# Altium PCB ET2_test Chip.PcbDoc
Units mm, origin at the board's own origin, x right, y up, seen from the top; angles counter-clockwise.
Board outline 101.6 x 91.44 mm, 4 copper layers (Top Layer, GND, POWER, Bottom Layer), stack 1.565 mm thick; 148 components, 68 nets, 450 pads, 320 vias.
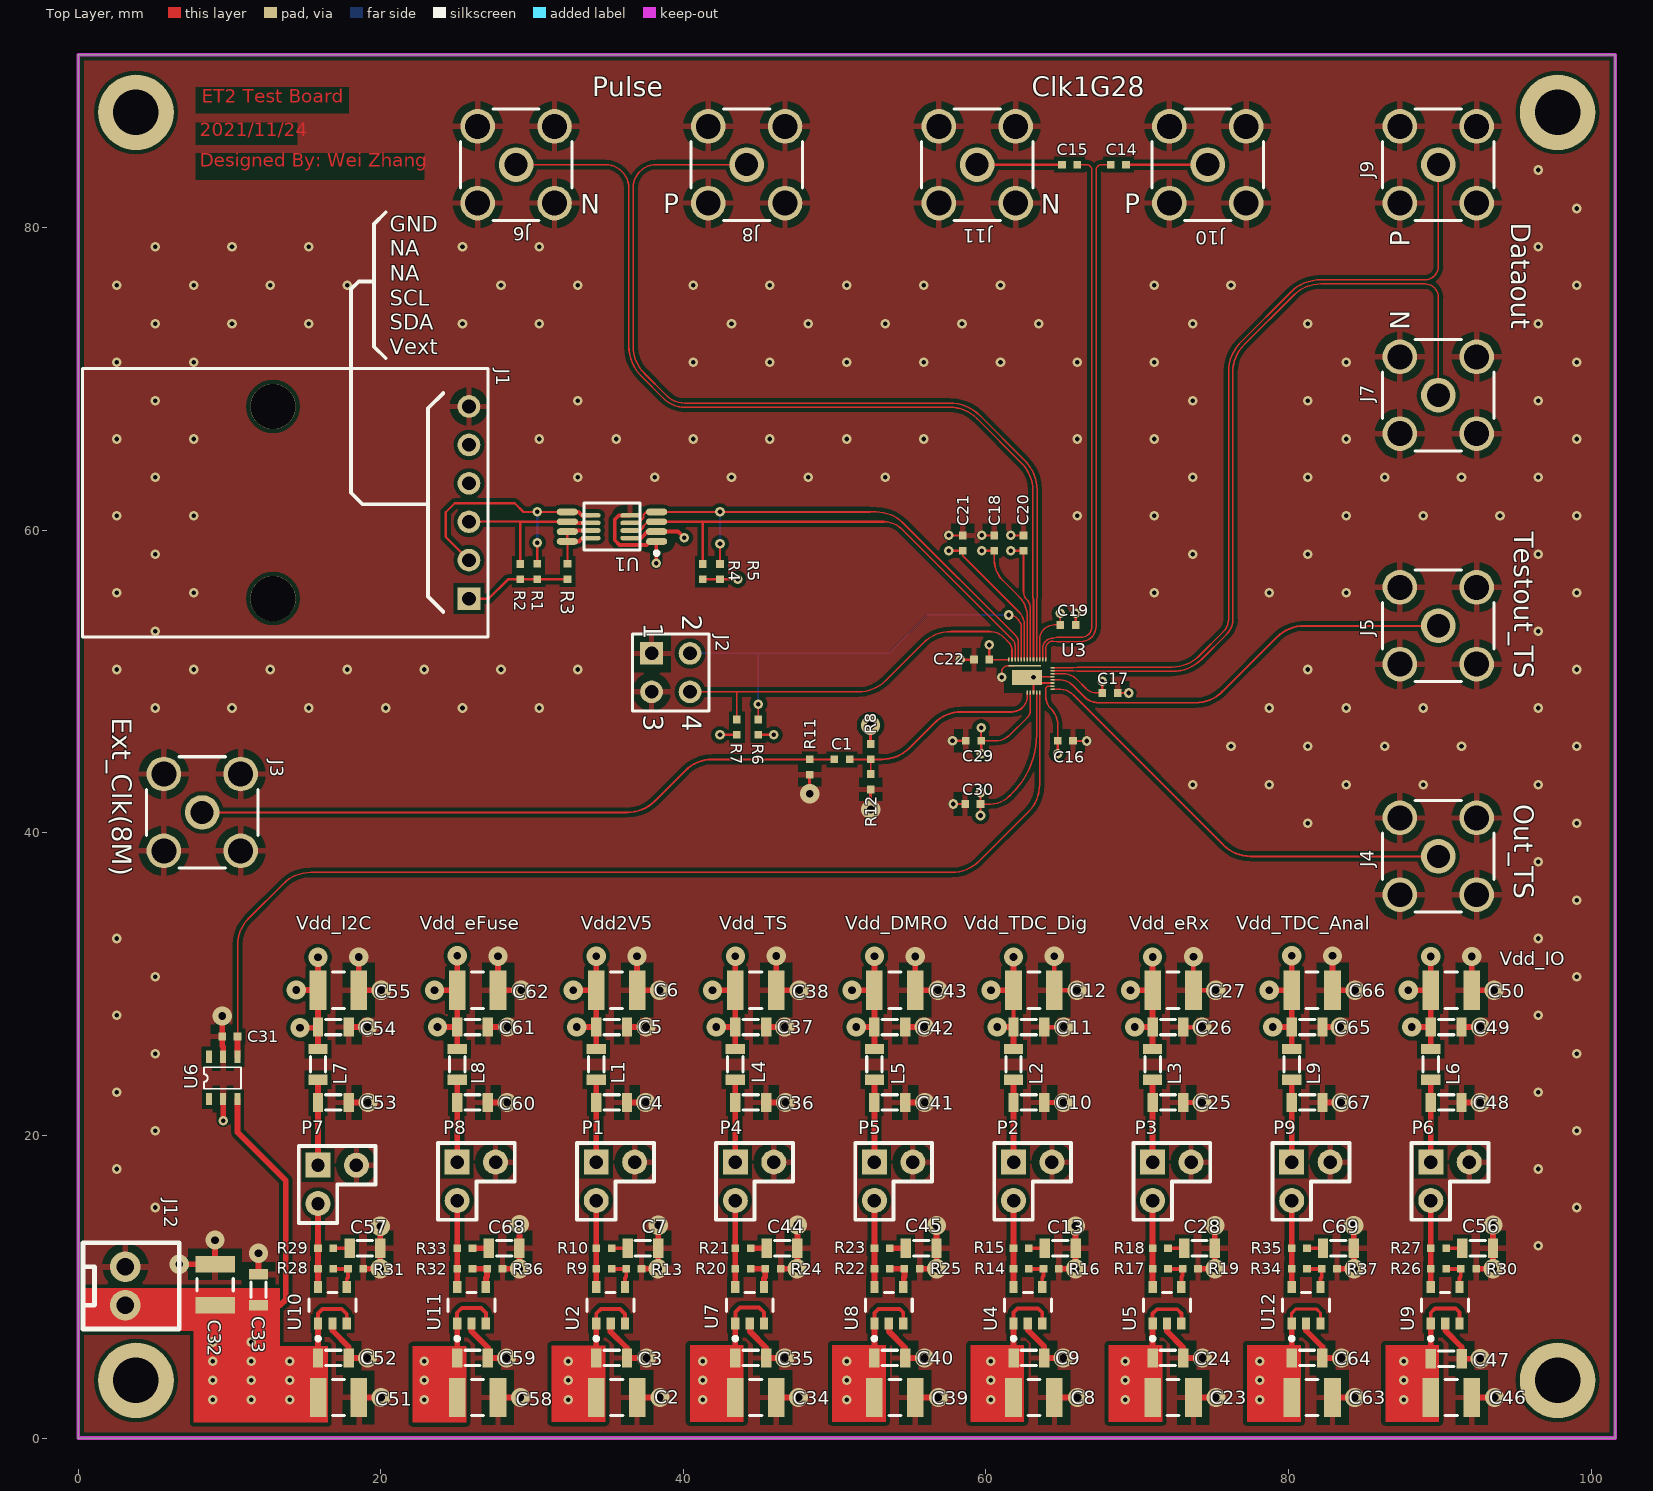
[diagram p0: Top Layer view]
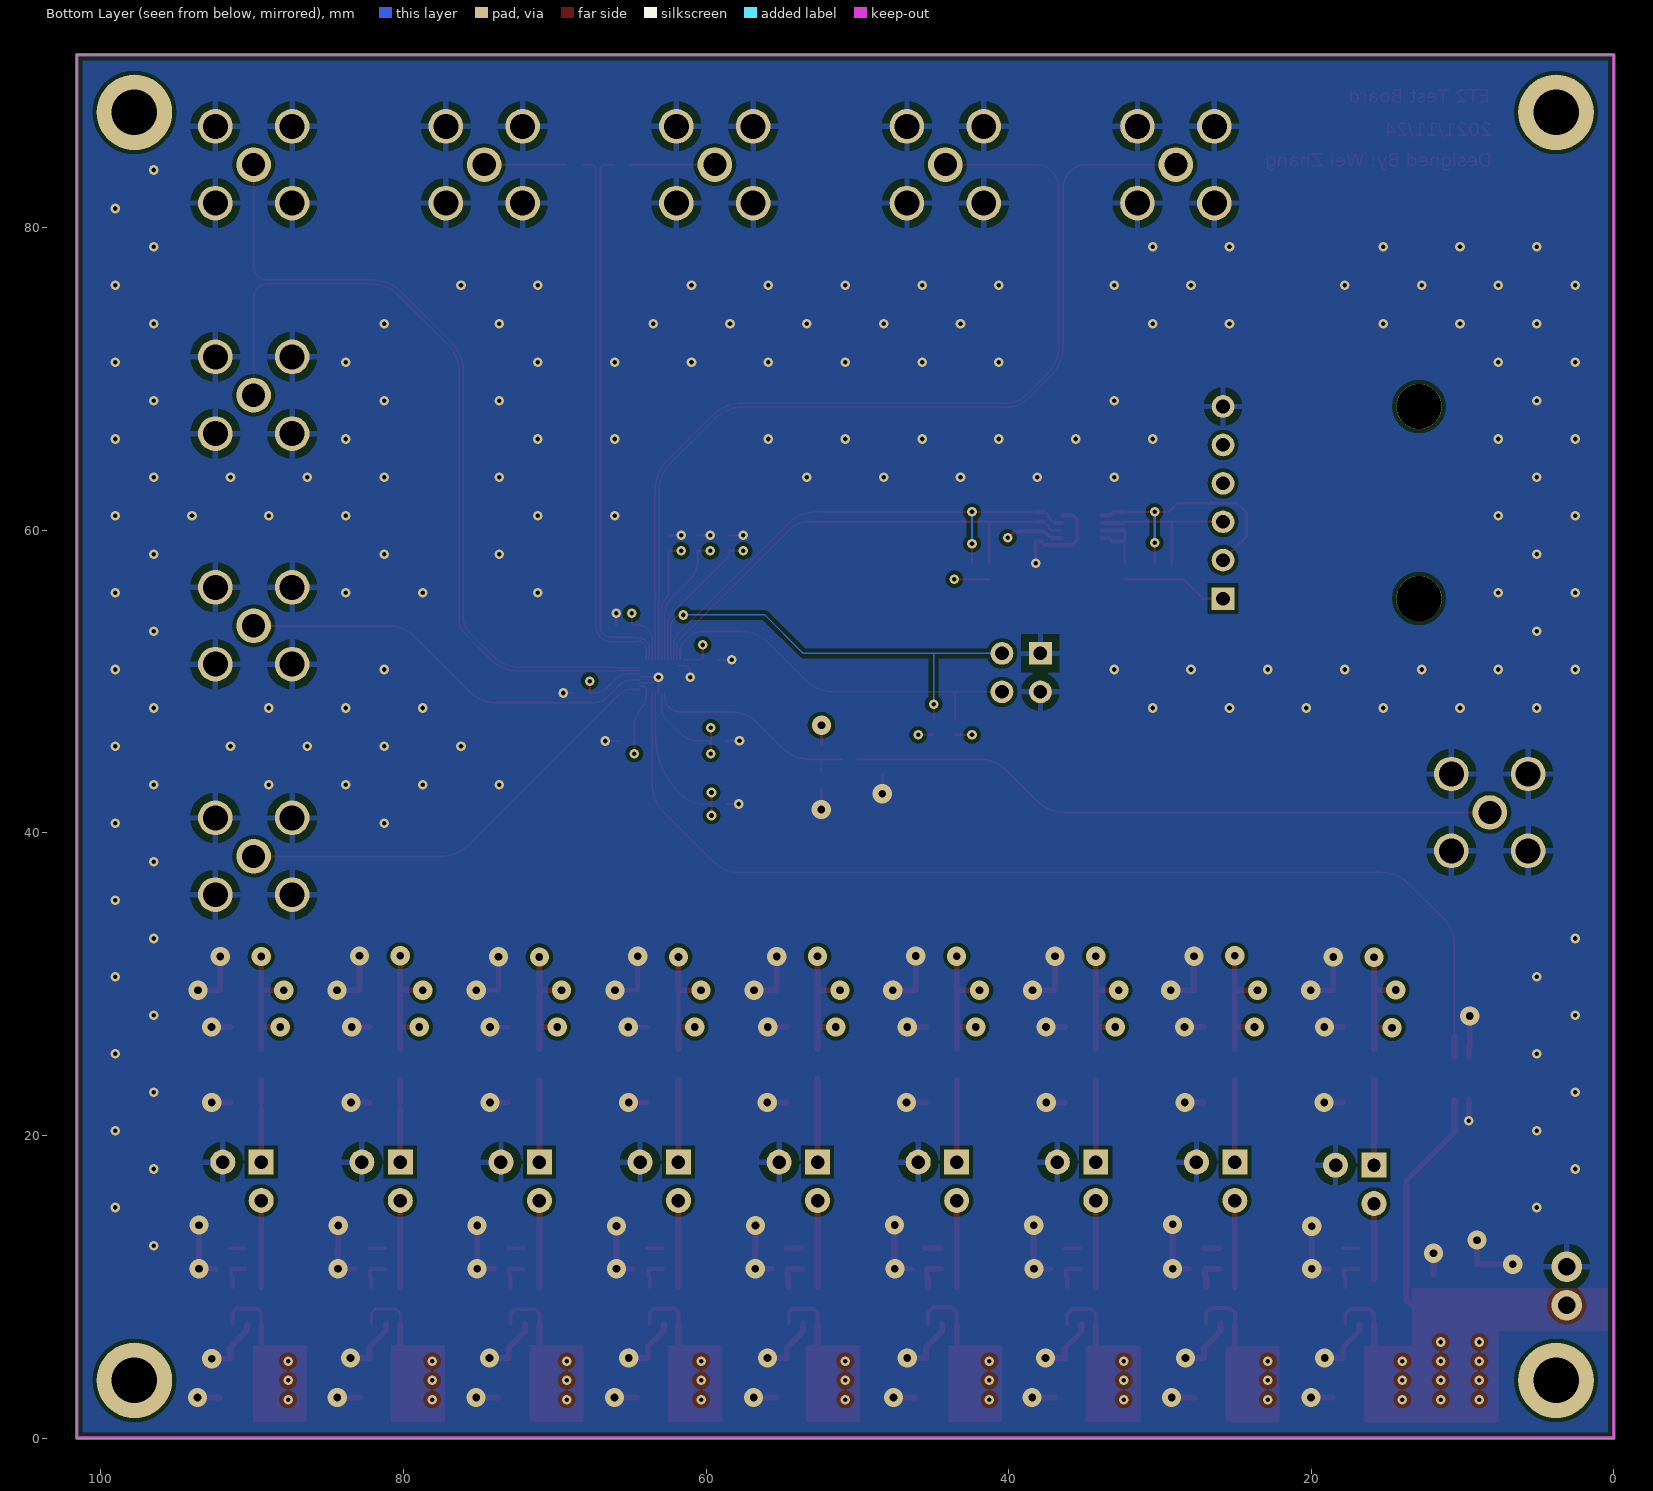
[diagram p1: Bottom Layer view, seen from below]
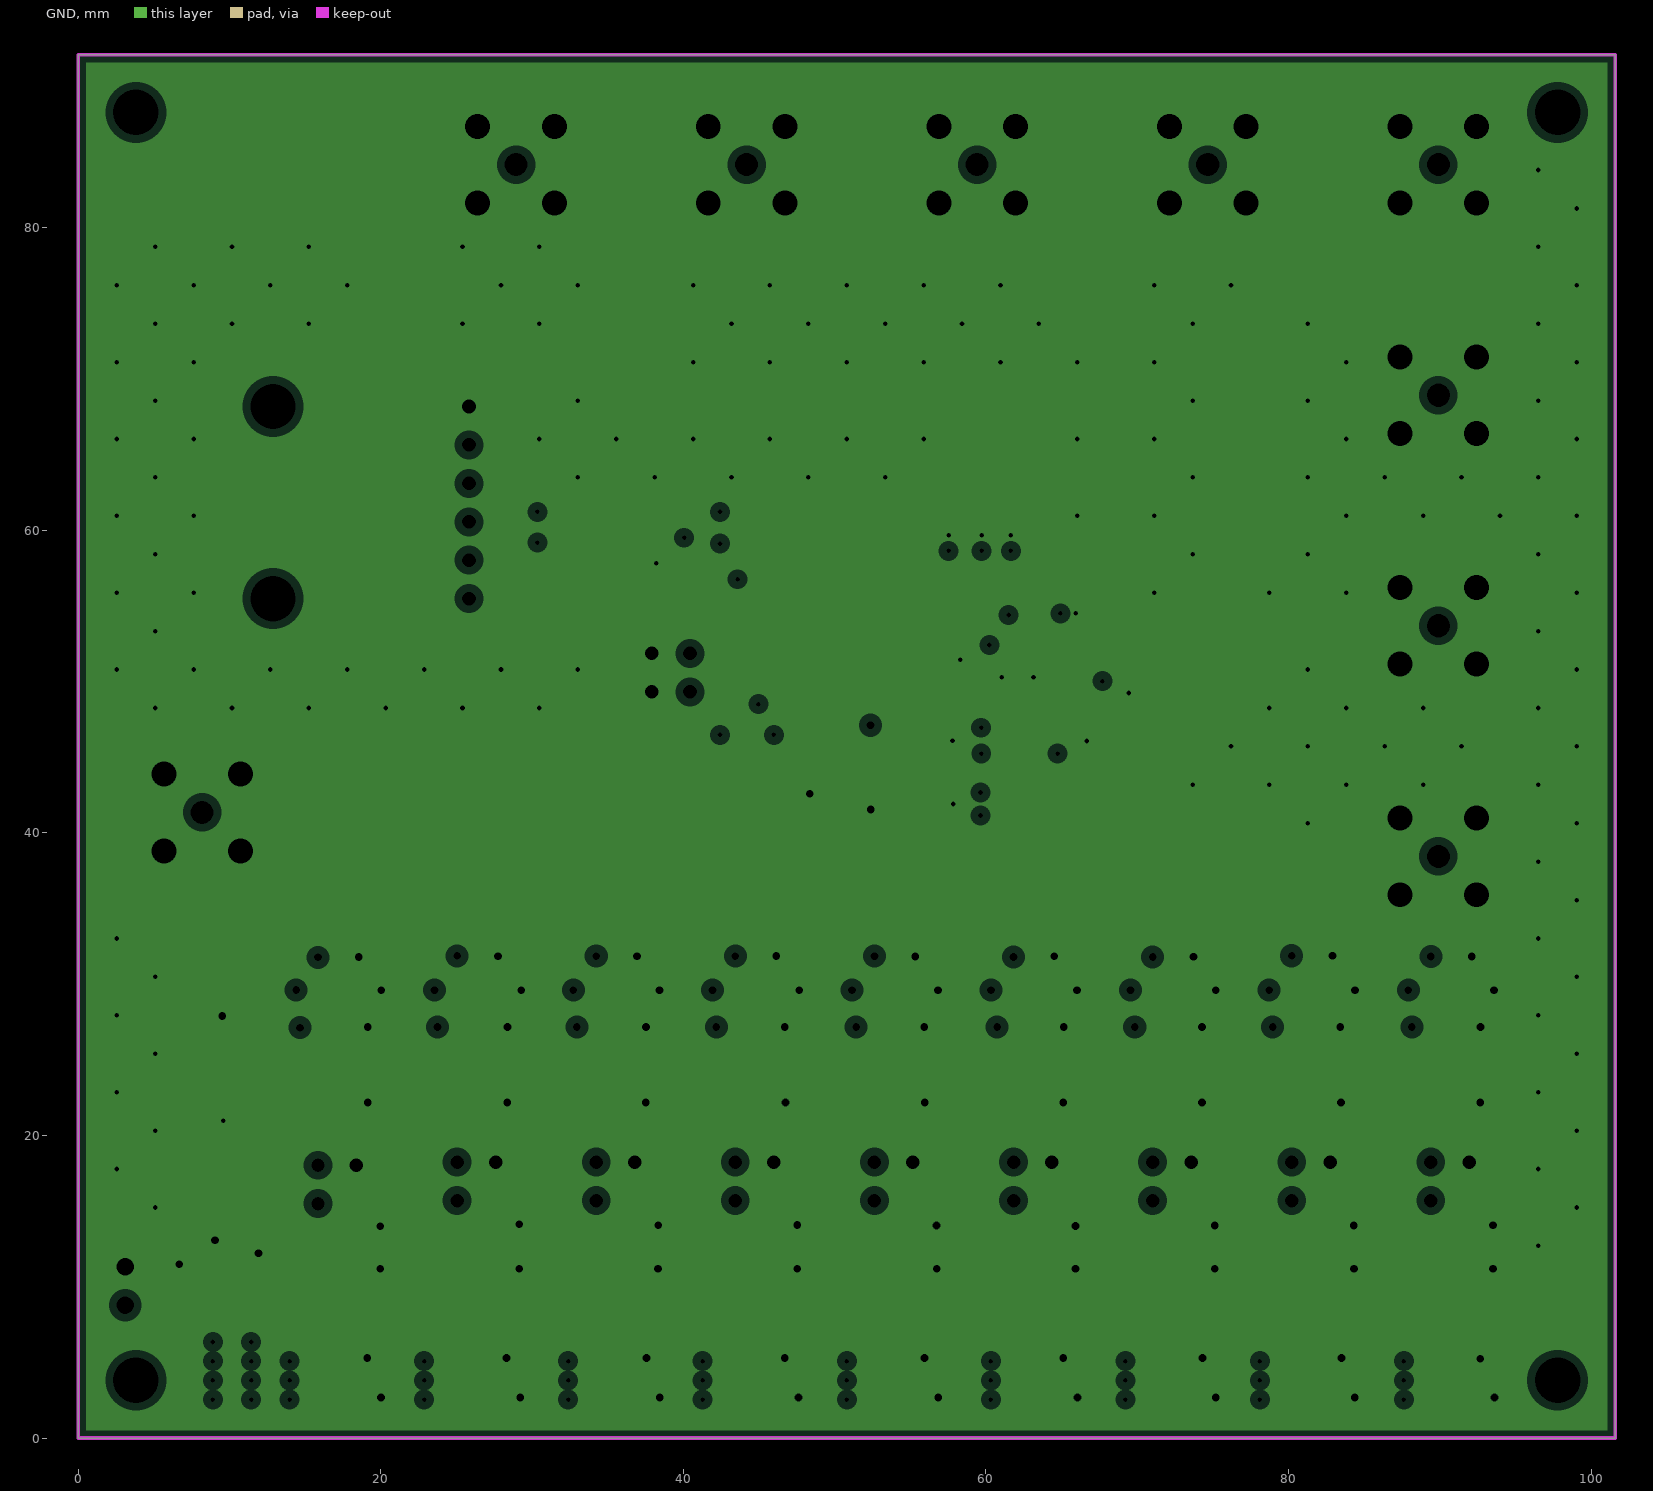
[diagram p2: GND, clearances drawn from the general rule]
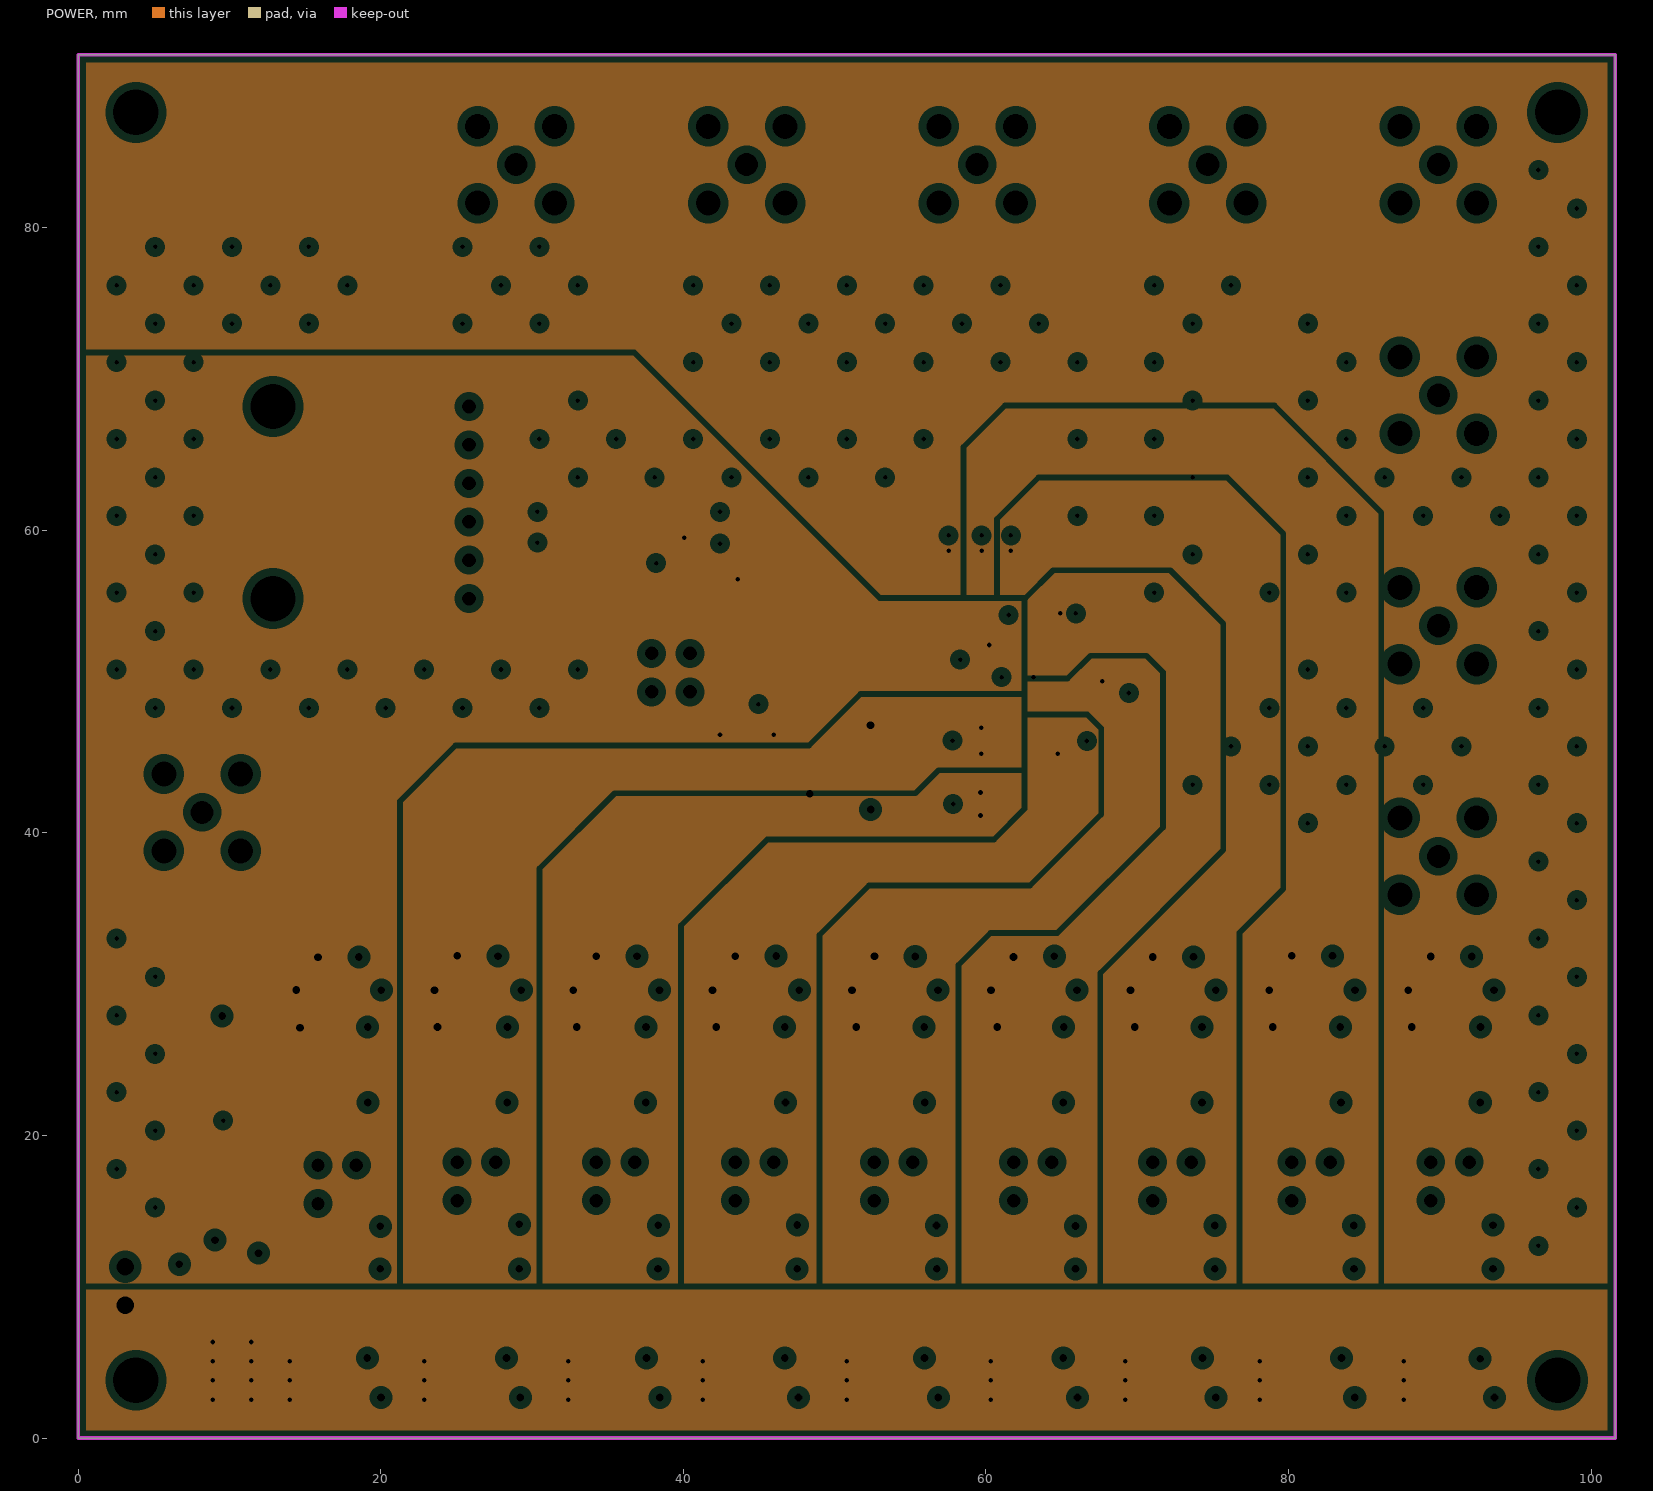
[diagram p3: POWER, clearances drawn from the general rule]

## Layer stack, top to bottom
Top Solder: solder mask 0.0178, Solder Resist, Dk 3.5
Top Layer: signal copper 0.0356
Dielectric 1: core 0.0787, FR-4, Dk 4.2
GND: plane copper 0.033, net (Multiple Nets)
Dielectric 3: prepreg 1.27, Dk 4.2
POWER: plane copper 0.033, net GND
Dielectric 2: core 0.0787, Dk 4.2
Bottom Layer: signal copper 0.0356
Bottom Solder: solder mask 0.0178, Solder Resist, Dk 3.5

## Board outline
0,0 101.6,0 101.6,91.44 0,91.44 0,0

## Design rules (kind name [scope] priority, off if disabled: settings)
Clearance [All] p1: gap=0.254 ignorepadtopadclearanceinfootprint=FALSE except(0: Arc-Hole Track-Hole SMDPad-Hole THPad-Hole Via-Hole Fill-Hole Poly-Hole Region-Hole Text-Hole; 0.076: Track-Track Track-SMDPad SMDPad-SMDPad; 0.102: Arc-Arc Arc-Track Arc-SMDPad Track-THPad Track-Via SMDPad-THPad SMDPad-Via SMDPad-Region THPad-Via Text-Text)
DiffPairsRouting [All] p1: maxlimit=0.254 minlimit=0.102 mostfreqgap=0.178 toplayer_minwidth=0.102 toplayer_maxwidth=0.381 toplayer_prefwidth=0.102 bottomlayer_minwidth=0.102 bottomlayer_maxwidth=0.381 bottomlayer_prefwidth=0.102 maxuncoupledlength=12.7
PlaneClearance [All] p1: clearance=0.508
PlaneConnect [InNetClass('All Nets')] p1: planeconnectstyle=Relief reliefexpansion=0.381 reliefentries=4 reliefconductorwidth=0.254 reliefairgap=0.203
PolygonConnect PolygonConnect_1 [IsVia] p1: connectstyle=Direct reliefconductorwidth=0.254 reliefentries=4 polygonreliefangle="90 Angle" airgapwidth=0.254
PolygonConnect Via [All] p2: connectstyle=Relief reliefconductorwidth=0.381 reliefentries=4 polygonreliefangle="90 Angle" airgapwidth=0.508
RoutingVias [All] p1: holewidth=0.711 width=1.27 viastyle="Through Hole" minholewidth=0.711 minwidth=1.27 maxholewidth=0.711 maxwidth=1.27
SolderMaskExpansion [All] p1: expansion=0.102 istentingtop=FALSE
Width [All] p1: maxlimit=0.762 minlimit=0.076 preferedwidth=0.102
27 further rules are at their usual default settings.

## Classes and differential pairs
component class ET2_test_Chip: C1 C2 C3 C4 C5 C6 C7 C8 C9 C10 C11 C12 C13 C14 C15 C16 C17 C18 C19 C20 C21 C22 C23 C24 C25 C26 C27 C28 C29 C30 J1 J2 J3 J4 J5 J6 J7 J8 J9 J10 J11 L1 L2 L3 P1 P2 P3 R1 R2 R3 R4 R5 R6 R7 R8 R9 R10 R11 R12 R13 R14 R15 R16 R17 R18 R19 U1 U2 U3 U4 U5
component class "ET2_test Chip_V1": 30 C31 C32 C33 C34 C35 C36 C37 C38 C39 C40 C41 C42 C43 C44 C45 C46 C47 C48 C49 C50 C51 C52 C53 C54 C55 C56 C57 C58 C59 C60 C61 C62 C63 C64 C65 C66 C67 C68 C69 J12 L4 L5 L6 L7 L8 L9 P4 P5 P6 P7 P8 P9 R20 R21 R22 R23 R24 R25 R26 R27 R28 R29 R30 R31 R32 R33 R34 R35 R36 R37 U6 U7 U8 U9 U10 U11 U12
differential pair CLK1G28_IN: +CLK1G28_IN_P -CLK1G28_IN_N
differential pair DATAOUT: +DATAOUT_P -DATAOUT_N
differential pair PULSE_IN: +PULSE_IN_P -PULSE_IN_N

## Components (designator, comment, footprint, x,y, rotation, side; value= is the part's Value field where it differs from the comment)
C1 "Cap" 0402-EAGLE 49.977,44.864 r0 top
C2 "Cap" C1210 35.59,2.677 r180 top
C3 "Cap" 0805-EAGLE 36.271,5.293 r180 top
C4 "Cap" 0805-EAGLE 36.271,22.182 r180 top
C5 "Cap" 0805-EAGLE 36.271,27.165 r180 top
C6 "Cap" C1210 35.588,29.606 r180 top
C7 "Cap" 0805-EAGLE 38.342,12.548 r180 top
C8 "Cap" C1210 63.175,2.677 r180 top
C9 "Cap" 0805-EAGLE 63.858,5.293 r180 top
C10 "Cap" 0805-EAGLE 63.856,22.182 r180 top
C11 "Cap" 0805-EAGLE 63.856,27.165 r180 top
C12 "Cap" C1210 63.172,29.606 r180 top
C13 "Cap" 0805-EAGLE 65.926,12.548 r180 top
C14 "Cap" 0402-EAGLE 69.263,84.176 r180 top
C15 "Cap" 0402-EAGLE 65.024,84.176 r0 top
C16 "Cap" 0402-EAGLE 65.761,46.083 r180 top
C17 "Cap" 0402-EAGLE 68.707,49.251 r180 top
C18 "Cap" 0402-EAGLE 60.554,59.665 r270 top
C19 "Cap" 0402-EAGLE 65.938,53.746 r180 top
C20 "Cap" 0402-EAGLE 62.484,59.665 r270 top
C21 "Cap" 0402-EAGLE 58.471,59.665 r270 top
C22 "Cap" 0402-EAGLE 59.207,51.46 r0 top
C23 "Cap" C1210 72.367,2.677 r180 top
C24 "Cap" 0805-EAGLE 73.048,5.293 r180 top
C25 "Cap" 0805-EAGLE 73.05,22.182 r180 top
C26 "Cap" 0805-EAGLE 73.05,27.165 r180 top
C27 "Cap" C1210 72.367,29.606 r180 top
C28 "Cap" 0805-EAGLE 75.133,12.548 r180 top
C29 "Cap" 0402-EAGLE 58.674,46.083 r0 top
C30 "Cap" 0402-EAGLE 58.623,41.91 r0 top
C31 "Cap" 0402-EAGLE 9.51,26.543 r0 top
C32 "Cap" C1210 9.042,10.135 r270 top
C33 "Cap" 0805-EAGLE 11.913,10.815 r270 top
C34 "Cap" C1210 44.785,2.677 r180 top
C35 "Cap" 0805-EAGLE 45.466,5.293 r180 top
C36 "Cap" 0805-EAGLE 45.466,22.182 r180 top
C37 "Cap" 0805-EAGLE 45.466,27.165 r180 top
C38 "Cap" C1210 44.785,29.606 r180 top
C39 "Cap" C1210 53.978,2.677 r180 top
C40 "Cap" 0805-EAGLE 54.658,5.293 r180 top
C41 "Cap" 0805-EAGLE 54.661,22.182 r180 top
C42 "Cap" 0805-EAGLE 54.661,27.165 r180 top
C43 "Cap" C1210 53.978,29.606 r180 top
C44 "Cap" 0805-EAGLE 47.536,12.548 r180 top
C45 "Cap" 0805-EAGLE 56.731,12.548 r180 top
C46 "Cap" C1210 90.762,2.677 r180 top
C47 "Cap" 0805-EAGLE 91.445,5.243 r180 top
C48 "Cap" 0805-EAGLE 91.44,22.182 r180 top
C49 "Cap" 0805-EAGLE 91.44,27.165 r180 top
C50 "Cap" C1210 90.759,29.606 r180 top
C51 "Cap" C1210 17.201,2.677 r180 top
C52 "Cap" 0805-EAGLE 17.879,5.293 r180 top
C53 "Cap" 0805-EAGLE 17.879,22.182 r180 top
C54 "Cap" 0805-EAGLE 17.879,27.165 r180 top
C55 "Cap" C1210 17.196,29.606 r180 top
C56 "Cap" 0805-EAGLE 93.523,12.548 r180 top
C57 "Cap" 0805-EAGLE 19.964,12.548 r180 top
C58 "Cap" C1210 26.393,2.677 r180 top
C59 "Cap" 0805-EAGLE 27.076,5.293 r180 top
C60 "Cap" 0805-EAGLE 27.076,22.182 r180 top
C61 "Cap" 0805-EAGLE 27.076,27.165 r180 top
C62 "Cap" C1210 26.396,29.606 r180 top
C63 "Cap" C1210 81.562,2.677 r180 top
C64 "Cap" 0805-EAGLE 82.24,5.293 r180 top
C65 "Cap" 0805-EAGLE 82.245,27.165 r180 top
C66 "Cap" C1210 81.562,29.606 r180 top
C67 "Cap" 0805-EAGLE 82.245,22.182 r180 top
C68 "Cap" 0805-EAGLE 29.159,12.548 r180 top
C69 "Cap" 0805-EAGLE 84.316,12.548 r180 top
J1 "Header 6" USB_ISS 25.827,55.489 r90 top
J2 "Header 2X2" HDR2X2 37.897,51.867 r270 top
J3 "SMA1" SMA_MID 8.191,41.354 r0 top
J4 "SMA1" SMA_MID 89.903,38.453 r0 top
J5 "SMA1" SMA_MID 89.903,53.693 r0 top
J6 "SMA1" SMA_MID 28.943,84.173 r0 top
J7 "SMA1" SMA_MID 89.903,68.933 r0 top
J8 "SMA1" SMA_MID 44.183,84.173 r0 top
J9 "SMA1" SMA_MID 89.903,84.173 r0 top
J10 "SMA1" SMA_MID 74.663,84.173 r0 top
J11 "SMA1" SMA_MID 59.423,84.173 r0 top
J12 "Header 2" POWERJ2 3.106,8.781 r180 top
L1 "Inductor" 0805-EAGLE 34.239,23.68 r90 top
L2 "Inductor" 0805-EAGLE 61.824,23.68 r90 top
L3 "Inductor" 0805-EAGLE 71.018,23.68 r90 top
L4 "Inductor" 0805-EAGLE 43.434,23.68 r90 top
L5 "Inductor" 0805-EAGLE 52.629,23.68 r90 top
L6 "Inductor" 0805-EAGLE 89.408,23.68 r90 top
L7 "Inductor" 0805-EAGLE 15.847,23.68 r90 top
L8 "Inductor" 0805-EAGLE 25.044,23.68 r90 top
L9 "Inductor" 0805-EAGLE 80.213,23.68 r90 top
P1 "Header 3" HEADER3_L 34.239,18.237 r270 top
P2 "Header 3" HEADER3_L 61.824,18.237 r270 top
P3 "Header 3" HEADER3_L 71.018,18.237 r270 top
P4 "Header 3" HEADER3_L 43.434,18.237 r270 top
P5 "Header 3" HEADER3_L 52.629,18.237 r270 top
P6 "Header 3" HEADER3_L 89.408,18.237 r270 top
P7 "Header 3" HEADER3_L 15.847,18.034 r270 top
P8 "Header 3" HEADER3_L 25.044,18.237 r270 top
P9 "Header 3" HEADER3_L 80.213,18.237 r270 top
R1 "Res1" 0402-EAGLE 30.348,57.785 r270 top
R2 "Res1" 0402-EAGLE 29.21,57.775 r270 top
R3 "Res1" 0402-EAGLE 32.334,57.785 r270 top
R4 "Res1" 0402-EAGLE 41.283,57.775 r270 top
R5 "Res1" 0402-EAGLE 42.418,57.775 r270 top
R6 "Res1" 0402-EAGLE 44.958,47.495 r270 top
R7 "Res1" 0402-EAGLE 43.536,47.495 r270 top
R8 "Res1" 0402-EAGLE 52.38,44.867 r90 top
R9 "1%" 0402-EAGLE 35.255,11.183 r180 top
R10 "1%" 0402-EAGLE 35.255,12.548 r180 top
R11 "Res1" 0402-EAGLE 48.349,43.851 r90 top
R12 "Res1" 0402-EAGLE 52.38,42.875 r90 top
R13 "1%" 0402-EAGLE 37.237,11.183 r180 top
R14 "1%" 0402-EAGLE 62.84,11.183 r180 top
R15 "1%" 0402-EAGLE 62.84,12.548 r180 top
R16 "1%" 0402-EAGLE 64.821,11.183 r180 top
R17 "1%" 0402-EAGLE 72.034,11.183 r180 top
R18 "1%" 0402-EAGLE 72.034,12.548 r180 top
R19 "1%" 0402-EAGLE 74.016,11.183 r180 top
R20 "1%" 0402-EAGLE 44.45,11.183 r180 top
R21 "1%" 0402-EAGLE 44.45,12.548 r180 top
R22 "1%" 0402-EAGLE 53.645,11.183 r180 top
R23 "1%" 0402-EAGLE 53.645,12.548 r180 top
R24 "1%" 0402-EAGLE 46.431,11.183 r180 top
R25 "1%" 0402-EAGLE 55.626,11.183 r180 top
R26 "1%" 0402-EAGLE 90.424,11.183 r180 top
R27 "1%" 0402-EAGLE 90.424,12.548 r180 top
R28 "1%" 0402-EAGLE 16.863,11.183 r180 top
R29 "1%" 0402-EAGLE 16.863,12.548 r180 top
R30 "1%" 0402-EAGLE 92.405,11.183 r180 top
R31 "1%" 0402-EAGLE 18.845,11.183 r180 top
R32 "1%" 0402-EAGLE 26.06,11.183 r180 top
R33 "1%" 0402-EAGLE 26.06,12.548 r180 top
R34 "1%" 0402-EAGLE 81.229,11.183 r180 top
R35 "1%" 0402-EAGLE 81.229,12.548 r180 top
R36 "1%" 0402-EAGLE 28.042,11.183 r180 top
R37 "1%" 0402-EAGLE 83.211,11.183 r180 top
U1 "PCA9306DCUR" PCA9306 35.176,60.241 r180 top
U2 "AP7331-WG-7" FP-SOT25-MFG 35.189,8.773 r90 top
U3 "ET2_test Chip" "ET2_TEST CHIP" 61.722,49.784 r0 top
U4 "AP7331-WG-7" FP-SOT25-MFG 62.774,8.773 r90 top
U5 "AP7331-WG-7" FP-SOT25-MFG 71.968,8.773 r90 top
U6 "ADR130AUJZ" ADR130 9.576,23.8 r90 top
U7 "AP7331-WG-7" FP-SOT25-MFG 44.384,8.773 r90 top
U8 "AP7331-WG-7" FP-SOT25-MFG 53.579,8.773 r90 top
U9 "AP7331-WG-7" FP-SOT25-MFG 90.358,8.773 r90 top
U10 "AP7331-WG-7" FP-SOT25-MFG 16.8,8.773 r90 top
U11 "AP7331-WG-7" FP-SOT25-MFG 25.994,8.773 r90 top
U12 "AP7331-WG-7" FP-SOT25-MFG 81.163,8.773 r90 top

## Footprints (in the part's own frame and the unit in brackets; to place one, negate y for a bottom-side part, rotate by r counter-clockwise, add the part's x,y. Pads: shape width x height; smd on the part's side, far side on the other; paste and mask are expansions set on the pad)
0402-EAGLE [mil]
  rect 20x20 smd: 1(0,0) 2(40,0)
0805-EAGLE [mil]
  rect 27x50 smd: 1(0,0) 2(80,0)
  silkscreen extent 20,-20 60,20
ADR130 [mm]
  rect 0.8x0.4 smd: 1(-1.4,0.95) 2(-1.4,0) 3(-1.4,-0.95) 4(1.4,-0.95) 5(1.4,0) 6(1.4,0.95)
  silkscreen extent -0.71,-1.17 0.71,1.27
C1210 [mm] "Chip Capacitor, Body 3.2x2.5mm, IPC High Density"
  rect 1.1x2.6 smd: 1(-1.35,0) 2(1.35,0)
  silkscreen extent -0.4,-1.2 0.4,1.2, body extent -1.7,-1.35 1.7,1.35, height 1.3
"ET2_TEST CHIP" [mil]
  rect 2.56x2.56 on Mech13: 0(5.12,36.8) 0(8.66,36.8) 0(12.4,36.8) 0(16.73,36.8) 0(21.06,36.8) 0(25.4,36.8) 0(29.14,36.8) 0(32.68,36.8) 0(36.2,36.8) 0(40.53,36.8) 0(43.76,36.8) 0(46.03,2.57) 0(48.19,36.8) 0(49.13,2.57) 0(51.37,36.8) 0(52.13,2.57) 0(55.71,36.8) 0(59.52,36.8) 0(62.94,2.57) 0(63.07,36.8) 0(66.89,36.77) 0(69.92,2.57) 0(71.22,36.8) 0(76.17,5.18) 0(76.17,9.11) 0(76.17,12.11) 0(76.17,16.05) 0(76.17,19.89) 0(76.17,22.89) 0(76.17,26.07) 0(76.17,30.01)
  rect 78.74x39.37 smd paste-100: 0(39.37,19.68)
  rect 4x10 smd paste-10: 1(40,-20) 2(48,-20) 3(56,-20) 4(64,-20) 5(72,-20) 14(88,66) 15(80,66) 16(72,66) 18(64,66) 19(56,66) 20(48,66) 22(40,66) 25(32,66) 26(24,66) 27(16,66) 28(8,66) 29(0,66) 30(-8,66)
  rect 10x4 smd paste-10: 6(105,-11) 7(105,-3) 8(105,5) 9(105,13) 10(105,21) 11(105,29) 12(105,37) 13(105,45)
  rect 15x4 smd paste-10: 17(68,50) 21(53,50) 23(39,50) 24(24,50)
  rect 25x4 smd paste-10: 31(4,50)
FP-SOT25-MFG [mm]
  rect 0.8x0.55 smd paste+0: 1(-1.2,0.95) 2(-1.2,0) 3(-1.2,-0.95) 4(1.2,-0.95) 5(1.2,0.95)
  silkscreen extent -2.32,-1.55 0.85,1.55, body extent -1.7,-1.65 1.7,1.65, height 0.25
HDR2X2 [mm] "Connector; Header; 2x2 Position"
  rect 1.5x1.5 hole 0.9: 1(0,0)
  round 1.5 hole 0.9: 2(0,2.54) 3(2.54,0) 4(2.54,2.54)
  silkscreen extent -1.27,-1.27 3.81,3.81
HEADER3_L [mil]
  round 65 / inner oval 65x64 / far side round 65 hole 35: 1(100,0) 3(0,100)
  rect 65x65 / inner rect 65x64 / far side rect 65x65 hole 35: 2(0,0)
  silkscreen extent -50,-50 150,150
PCA9306 [mm] "PCA9306DTR2G(TSSOP8)+PCA9306DC(VSSOP8)"
  oval 1.4x0.45 smd: 1(-3.052,0.972) 2(-3.052,0.322) 3(-3.052,-0.328) 4(-3.052,-0.978) 5(2.848,-0.978) 6(2.848,-0.328) 7(2.848,0.322) 8(2.848,0.972)
  oval 1.3x0.3 smd: 1(-1.3,-0.75) 2(-1.3,0.75) 3(-1.3,0.25) 4(-1.3,-0.25) 5(1.3,-0.75) 6(1.3,-0.25) 7(1.3,0.25) 8(1.3,0.75)
  Top Layer lines w0.152: -1.3,0.25 -1.972,0.25 -2.169,0.053 -2.169,-0.033 -2.464,-0.328 -2.56,-0.328 -3.052,-0.328 ; -1.3,-0.25 -1.741,-0.25 -1.844,-0.25 -2.192,-0.598 -2.192,-0.785 -2.385,-0.978 -3.052,-0.978
  Top Layer lines w0.254: 2.848,-0.328 2.771,-0.25 1.3,-0.25 ; 2.848,-0.978 2.103,-0.978 1.875,-0.75 1.3,-0.75 ; 2.817,0.998 2.791,0.972 2.07,0.972 1.847,0.75 1.3,0.75 ; 1.3,0.25 2.776,0.25 2.848,0.322 ; -1.3,0.75 -2.034,0.75 -2.461,0.322 -3.052,0.322 ; -1.3,-0.25 -1.741,-0.25 ; -1.3,-0.75 -0.554,-0.75 -0.287,-0.483 -0.287,0.897 -0.605,1.214 -2.398,1.214 -2.639,0.972 -3.052,0.972 ; -2.469,-0.978 -3.052,-0.978 ; -2.56,-0.328 -3.052,-0.328 ; 2.848,0.322 2.848,0.322
  silkscreen extent -3.18,-1.55 1.75,1.87
POWERJ2 [mil]
  round 80 hole 45: 1(0,0) 2(0,-100)
  silkscreen extent -140,-162 110,62
SMA_MID [mil]
  round 90 hole 60: 1(0,0)
  round 90 hole 65: 2(-100,100) 3(-100,-100) 4(100,-100) 5(100,100)
  silkscreen extent -145,-145 145,145
USB_ISS [mm] "USB-ISS modul for I2C, SPI, serial port"
  rect 1.5x1.5 hole 0.9: 1(0,0)
  round 1.5 hole 0.9: 2(2.54,0) 3(5.08,0) 4(7.62,0) 5(10.16,0) 6(12.7,0)
  round 3 hole 3 unplated: ""(0,12.954) ""(12.7,12.954)
  silkscreen extent -2.54,-1.27 15.21,25.54

## Part data
C1 C2 C3 C4 C5 C6 C7 C8 C9 C10 C11 C12 C13 C14 C15 C16 C17 C18 C19 C20 C21 C22 C23 C24 C25 C26 C27 C28 C29 C30 C31 C32 C33 C34 C35 C36 C37 C38 C39 C40 C41 C42 C43 C44 C45 C46 C47 C48 C49 C50 C51 C52 C53 C54 C55 C56 C57 C58 C59 C60 C61 C62 C63 C64 C65 C66 C67 C68 C69: "Capacitor"
J1: "Header, 6-Pin"
J2: "Header, 2-Pin, Dual row"
J12: "Header, 2-Pin"
P1 P2 P3 P4 P5 P6 P7 P8 P9: "Header, 3-Pin"
R1 R2 R3 R4 R5 R6 R7 R8 R11 R12: "Resistor"
R9 R10 R13 R14 R15 R16 R17 R18 R19 R20 R21 R22 R23 R24 R25 R26 R27 R28 R29 R30 R31 R32 R33 R34 R35 R36 R37: library part Res1, "Resistor"
U1: library part PCA9306
U2 U4 U5 U7 U8 U9 U10 U11 U12: library part CMP-12756-000022-1, "IC REG LIN POS ADJ 300MA SOT25"
U6: library part ADR130

## Free pads (board coordinates)
  round 5 hole 3: 0(3.81,3.81) 0(3.81,87.63) 0(97.79,3.81) 0(97.79,87.63)

## Via types
v1: diameter 0.635, hole 0.305, Top Layer to Bottom Layer, tented both sides, 214 vias
v2: diameter 1.27, hole 0.508, Top Layer to Bottom Layer, tented both sides, 106 vias

## Nets (pads, with @x,y where several pads share a name; then routed paths per layer and width w, separated by ;. In a path a pad name is that pad's centre, name@x,y a point inside that pad or via, vN(x,y) a via of type N, cw(c..) or ccw(c..) an arc to the next point about the centre after c; other vN are vias at no path point)
CLK1G28_IN_N: C15.2 U3.15 | length 36.1
  Top Layer w0.102: U3.15 63.754,52.197 cw(c64.44,52.197) 64.44,52.883 64.684,52.921 66.271,52.921 ccw(c66.271,53.652) 67.003,53.652 67.003,83.817 ccw(c66.645,83.817) 66.645,84.176 C15.2
CLK1G28_IN_P: C14.2 U3.14 | length 36.3
  Top Layer w0.102: U3.14 63.957,52.197 cw(c64.44,52.197) 64.44,52.68 64.684,52.642 66.271,52.642 ccw(c66.271,53.652) 67.282,53.652 67.282,83.817 cw(c67.64,83.817) 67.64,84.176 C14.2
DATAOUT_N: J7.1 U3.12 | length 53.2
  Top Layer w0.102: U3.12 65.773,50.724 66.032,50.683 72.325,50.683 ccw(c72.325,53.425) 74.264,51.486 75.896,53.118 ccw(c74.878,54.135) 76.317,54.135 76.317,70.467 cw(c78.857,70.467) 77.061,72.263 80.344,75.546 cw(c82.14,73.75) 82.14,76.29 89.024,76.29 cw(c89.024,75.411) 89.903,75.411 J7.1
DATAOUT_P: J9.1 U3.13 | length 53.5
  Top Layer w0.102: U3.13 65.773,50.927 66.032,50.963 72.325,50.963 ccw(c72.325,53.425) 74.066,51.684 75.698,53.316 ccw(c74.878,54.135) 76.037,54.135 76.037,70.467 cw(c78.857,70.467) 76.863,72.46 80.146,75.744 cw(c82.14,73.75) 82.14,76.569 89.024,76.569 ccw(c89.024,77.448) 89.903,77.448 J9.1
GND: C2.1 C3.1 C4.1 C5.1 C6.1 C7.1 C8.1 C9.1 C10.1 C11.1 C12.1 C13.1 C16.1 C17.1 C18.1 C19.1 C20.1 C21.1 C22.1 C23.1 C24.1 C25.1 C26.1 C27.1 C28.1 C29.1 C30.1 C31.1 C32.1 C33.1 C34.1 C35.1 C36.1 C37.1 C38.1 C39.1 C40.1 C41.1 C42.1 C43.1 C44.1 C45.1 C46.1 C47.1 C48.1 C49.1 C50.1 C51.1 C52.1 C53.1 C54.1 C55.1 C56.1 C57.1 C58.1 C59.1 C60.1 C61.1 C62.1 C63.1 C64.1 C65.1 C66.1 C67.1 C68.1 C69.1 J1.6 J2.1 J2.3 J3.2 J3.3 J3.4 J3.5 J4.2 J4.3 J4.4 J4.5 J5.2 J5.3 J5.4 J5.5 J6.2 J6.3 J6.4 J6.5 J7.2 J7.3 J7.4 J7.5 J8.2 J8.3 J8.4 J8.5 J9.2 J9.3 J9.4 J9.5 J10.2 J10.3 J10.4 J10.5 J11.2 J11.3 J11.4 J11.5 J12.2 P1.3 P2.3 P3.3 P4.3 P5.3 P6.3 P7.3 P8.3 P9.3 R11.1 R12.1 R13.1 R16.1 R19.1 R24.1 R25.1 R30.1 R31.1 R36.1 R37.1 U1.1 U2.2 U3.0@62.722,50.284 U3.3 U3.8 U3.10 U3.17 U3.21 U3.23 U3.24 U3.31 U4.2 U5.2 U6.2 U6.5 U7.2 U8.2 U9.2 U10.2 U11.2 U12.2 | length 169.3
  Top Layer w0.102: v1(61.036,50.292) 61.036,50.648 cw(c61.404,50.648) 61.144,50.908 61.163,50.927 ; 61.155,50.919 cw(c61.481,50.592) 61.481,51.054 U3.31 ; U3.3 v1(63.144,50.292) ; U3.8 63.525,49.911 v1(63.144,50.292) ; U3.10 63.17,50.317 v1(63.144,50.292) ; C16.1 C16.1@65.768,46.076
  Top Layer w0.152: v1(57.531,59.665) C21.1 ; v1(57.793,46.096) C29.1@58.661,46.096 ; v1(57.836,41.91) C30.1 ; v1(58.293,51.448) 59.195,51.448 C22.1 ; v1(59.715,59.665) C18.1 ; v1(61.646,59.665) C20.1 ; C16.1@65.768,46.076 v1(66.675,46.076) ; C19.1 v1(65.938,54.508) ; C17.1 v1@69.621,49.251
  Top Layer w0.203: v2@48.336,42.578 v2(48.349,42.591) R11.1 ; v2(52.38,41.549) R12.1
  Top Layer w0.254: v1(38.202,57.836) 38.202,59.242 U1.1@38.228,59.269
  Top Layer w0.305: C10.1 v2(65.118,22.182) v2@65.126,22.174 ; C11.1 v2(65.138,27.165) v2@65.176,27.127 ; v2(64.522,31.845) C12.1 v2(66.025,29.606) ; C25.1 v2(74.287,22.182) v2@74.295,22.174 ; C26.1 v2(74.282,27.165) v2@74.295,27.178 ; v2@73.787,31.877 v2(73.717,31.807) C27.1 v2(75.194,29.606) v2@75.209,29.591
  Top Layer w0.381: v2(6.676,11.485) C32.1 v2(9.042,13.081) ; v2(9.51,27.899) C31.1 9.51,26.017 ccw(c9.735,26.017) 9.576,25.857 U6.5 ; v1(9.576,20.98) U6.2 ; C33.1 v2(11.913,12.217) ; U10.2 16.8,7.102 17.879,6.022 C52.1 v2(19.111,5.293) v2@19.126,5.309 ; C53.1 v2(19.144,22.182) v2@19.177,22.149 ; C54.1 v2(19.126,27.165) ; v2(18.542,31.801) 18.542,29.61 C55.1 v2(20.03,29.606) ; C51.1 v2(20.005,2.677) v2@20.015,2.667 ; R31.1 v2(19.957,11.183) 19.964,11.19 C57.1 v2(19.964,13.995) v2@19.964,14.148 ; U11.2 25.994,7.051 27.076,5.969 C59.1 v2(28.306,5.293) v2@28.321,5.309 ; C60.1 v2(28.346,22.182) v2@28.346,22.174 ; C61.1 v2(28.372,27.165) v2@28.372,27.229 ; v2@27.661,31.852 v2(27.746,31.852) C62.1 v2(29.286,29.606) ; C58.1 v2(29.225,2.677) v2@29.235,2.667 ; R36.1 v2(29.159,11.183) C68.1 v2(29.159,14.122) v2@29.185,14.122 ; U2.2 35.189,7.026 36.271,5.944 C3.1 v2(37.556,5.293) v2@37.567,5.283 ; C4.1 v2(37.508,22.182) ; C5.1 v2(37.529,27.165) ; v2@36.932,31.852 v2(36.938,31.845) C6.1 v2(38.415,29.606) ; C2.1 v2(38.445,2.677) v2@38.481,2.642 ; R13.1 v2(38.322,11.183) ; v2@38.342,11.203 C7.1 v2(38.342,14.059) ; U7.2 44.384,7.051 45.466,5.969 C35.1 v2(46.7,5.293) ; C36.1 v2(46.754,22.182) ; C37.1 v2(46.698,27.165) ; C34.1 v2(47.615,2.677) ; v2@46.177,31.902 v2(46.135,31.86) C38.1 v2(47.661,29.606) ; R24.1 v2(47.516,11.183) 47.536,11.203 C44.1 v2(47.536,14.085) v2@47.549,14.097 ; U8.2 53.579,7.051 54.658,5.972 C40.1 v2(55.941,5.293) ; C41.1 v2(55.949,22.182) v2@55.956,22.174 ; C42.1 v2(55.918,27.165) v2@55.931,27.153 ; C39.1 v2(56.855,2.677) ; v2@55.372,31.877 v2(55.328,31.833) C43.1 v2(56.83,29.606) v2@56.845,29.591 ; R25.1 v2(56.744,11.183) 56.744,12.548 C45.1 v2(56.731,14.046) ; U4.2 62.774,7.127 63.858,6.043 C9.1 v2(65.11,5.293) v2@65.126,5.309 ; C8.1 v2(66.055,2.677) v2@66.065,2.667 ; R16.1 v2(65.926,11.183) C13.1 v2(65.926,14.021) ; U5.2 71.968,7.051 73.048,5.972 C24.1 v2(74.31,5.293) v2@74.397,5.207 ; C23.1 v2(75.199,2.677) v2@75.209,2.667 ; R19.1 v2(75.133,11.183) C28.1 v2(75.133,14.046) v2@75.184,14.046 ; U12.2 81.163,7.102 82.24,6.025 C64.1 v2(83.505,5.293) v2@83.515,5.283 ; C67.1 v2(83.472,22.182) v2@83.49,22.2 ; C65.1 v2(83.426,27.165) v2@83.464,27.127 ; v2@82.906,31.877 v2(82.912,31.871) C66.1 v2(84.394,29.606) v2@84.404,29.616 ; C63.1 v2(84.379,2.677) ; R37.1 v2(84.328,11.183) 84.328,12.548 C69.1 v2(84.316,14.046) v2@84.379,14.046 ; U9.2 90.358,7.102 91.445,6.015 C47.1 v2(92.674,5.243) ; C48.1 v2(92.677,22.182) v2@92.71,22.149 ; C49.1 v2(92.697,27.165) v2@92.761,27.229 ; C46.1 v2(93.614,2.677) v2@93.65,2.642 ; v2@92.177,31.902 v2(92.109,31.835) C50.1 v2(93.589,29.606) ; R30.1 v2(93.523,11.183) C56.1 v2(93.523,14.072) v2@93.599,14.072
  other v1: 96.52,12.7 5.08,15.24 99.06,15.24 2.54,17.78 96.52,17.78 5.08,20.32 99.06,20.32 2.54,22.86 96.52,22.86 5.08,25.4 99.06,25.4 2.54,27.94 96.52,27.94 5.08,30.48 99.06,30.48 2.54,33.02 96.52,33.02 99.06,35.56 96.52,38.1 81.28,40.64 99.06,40.64 73.66,43.18 78.74,43.18 83.82,43.18 88.9,43.18 96.52,43.18 76.2,45.72 81.28,45.72 86.36,45.72 91.44,45.72 99.06,45.72 5.08,48.26 10.16,48.26 15.24,48.26 20.32,48.26 25.4,48.26 30.48,48.26 78.74,48.26 83.82,48.26 88.9,48.26 96.52,48.26 69.444,49.251 2.54,50.8 7.62,50.8 12.7,50.8 17.78,50.8 22.86,50.8 27.94,50.8 33.02,50.8 81.28,50.8 99.06,50.8 5.08,53.34 96.52,53.34 2.54,55.88 7.62,55.88 71.12,55.88 78.74,55.88 83.82,55.88 99.06,55.88 5.08,58.42 73.66,58.42 81.28,58.42 96.52,58.42 2.54,60.96 7.62,60.96 66.04,60.96 71.12,60.96 83.82,60.96 88.9,60.96 93.98,60.96 99.06,60.96 5.08,63.5 33.02,63.5 38.1,63.5 43.18,63.5 48.26,63.5 53.34,63.5 73.66,63.5 81.28,63.5 86.36,63.5 91.44,63.5 96.52,63.5 2.54,66.04 7.62,66.04 30.48,66.04 35.56,66.04 40.64,66.04 45.72,66.04 50.8,66.04 55.88,66.04 66.04,66.04 71.12,66.04 83.82,66.04 99.06,66.04 5.08,68.58 33.02,68.58 73.66,68.58 81.28,68.58 96.52,68.58 2.54,71.12 7.62,71.12 40.64,71.12 45.72,71.12 50.8,71.12 55.88,71.12 60.96,71.12 66.04,71.12 71.12,71.12 83.82,71.12 99.06,71.12 5.08,73.66 10.16,73.66 15.24,73.66 25.4,73.66 30.48,73.66 43.18,73.66 48.26,73.66 53.34,73.66 58.42,73.66 63.5,73.66 73.66,73.66 81.28,73.66 96.52,73.66 2.54,76.2 7.62,76.2 12.7,76.2 17.78,76.2 27.94,76.2 33.02,76.2 40.64,76.2 45.72,76.2 50.8,76.2 55.88,76.2 60.96,76.2 71.12,76.2 76.2,76.2 99.06,76.2 5.08,78.74 10.16,78.74 15.24,78.74 25.4,78.74 30.48,78.74 96.52,78.74 99.06,81.28 96.52,83.82
I2C_A0: J2.4 R7.1 U3.29 | length 25.8
  Top Layer w0.102: J2.4 43.536,49.327 ; R7.1 43.536,49.327 ; U3.29 61.722,52.095 ccw(c61.047,52.095) 61.524,52.572 61.153,52.943 ccw(c60.257,52.048) 60.257,53.315 57.669,53.315 ccw(c57.669,50.775) 55.873,52.571 53.373,50.071 cw(c51.577,51.867) 51.577,49.327 43.536,49.327
I2C_RSTN: J2.2 R6.1 U3.26 | length 29.9
  Top Layer w0.102: R6.1 v1(44.958,48.517) ; v1(61.499,54.407) cw(c61.499,53.574) 62.332,53.574 U3.26
  Bottom Layer w0.102: J2.2 44.958,51.867 ; v1(44.958,48.517) 44.958,51.867 ; v1(61.499,54.407) 56.109,54.407 53.569,51.867 44.958,51.867
I2C_SCL: R4.1 U1.3 U3.28 | length 30.9
  Top Layer w0.102: 53.238,60.569 cw(c53.238,58.827) 54.47,60.059 61.779,52.75 ; 61.76,52.768 61.779,52.749 ; U3.28 61.925,52.37 ccw(c61.362,52.37) 61.779,52.749
  Top Layer w0.152: U1.3@38.228,60.569 53.238,60.569 ; R4.1 41.283,60.566
I2C_SDA: R5.1 U1.4 U3.27 | length 32.1
  Top Layer w0.102: 52.324,61.219 52.74,61.219 cw(c52.74,58.679) 54.536,60.475 61.951,53.061 cw(c61.521,52.631) 62.128,52.631 U3.27
  Top Layer w0.152: U1.4@38.228,61.219 52.324,61.219 ; R5.1 v1(42.418,59.116)
  Bottom Layer w0.152: v1(42.418,59.116) v1(42.418,61.219)
NetC1_1: C1.1 J3.1 R11.2 | length 43
  Top Layer w0.127: J3.1 36.304,41.354 ccw(c36.304,43.894) 38.1,42.098 40.125,44.123 cw(c41.921,42.327) 41.921,44.867 R11.2 C1.1
NetC1_2: C1.2 R8.1 R12.2 U3.1 | length 14.6
  Top Layer w0.102: C1.2 C1.2@50.996,44.867 ; R12.2 R8.1 ; 62.407,48.285 ccw(c61.605,49.085) 62.738,49.085 U3.1
  Top Layer w0.127: C1.2@50.996,44.867 R8.1 53.137,44.867 ccw(c53.137,47.407) 54.933,45.611 56.584,47.262 cw(c58.38,45.466) 58.38,48.006 61.733,48.006 ccw(c61.733,48.96) 62.407,48.285
NetC4_2: C4.2 L1.1 P1.2 | length 6
  Top Layer w0.381: P1.2@34.239,17.729 P1.2 C4.2 L1.1
NetC7_2: C7.2 R10.1 | length 1.1
  Top Layer w0.254: R10.1 C7.2
NetC10_2: C10.2 L2.1 P2.2 | length 5.4
  Top Layer w0.381: P2.2 C10.2 L2.1
NetC13_2: C13.2 R15.1 | length 1.1
  Top Layer w0.254: R15.1 C13.2
NetC14_1: C14.1 J10.1 | length 5.4
  Top Layer w0.152: C14.1 J10.1@74.661,84.176
  Top Layer w0.254: J10.1@74.661,84.176 J10.1
NetC15_1: C15.1 J11.1 | length 5.6
  Top Layer w0.152: J11.1 C15.1@65.021,84.173
NetC25_2: C25.2 L3.1 P3.2 | length 5.4
  Top Layer w0.381: P3.2 C25.2 L3.1
NetC28_2: C28.2 R18.1 | length 1.1
  Top Layer w0.254: R18.1 C28.2
NetC36_2: C36.2 L4.1 P4.2 | length 5.4
  Top Layer w0.381: P4.2 L4.1
NetC41_2: C41.2 L5.1 P5.2 | length 7
  Top Layer w0.254: C41.2 L5.1
  Top Layer w0.381: P5.2 L5.1@52.629,23.774
NetC44_2: C44.2 R21.1 | length 1.1
  Top Layer w0.381: R21.1 C44.2
NetC45_2: C45.2 R23.1 | length 1.1
  Top Layer w0.381: R23.1 C45.2
NetC48_2: C48.2 L6.1 P6.2 | length 5
  Top Layer w0.381: P6.2 C48.2@89.408,21.775 ; C48.2 L6.1
NetC53_2: C53.2 L7.1 P7.2 | length 5.6
  Top Layer w0.381: P7.2 L7.1
NetC56_2: C56.2 R27.1 | length 1.1
  Top Layer w0.254: R27.1 C56.2
NetC57_2: C57.2 R29.1 | length 1.1
  Top Layer w0.254: R29.1 C57.2
NetC60_2: C60.2 L8.1 P8.2 | length 5.4
  Top Layer w0.381: P8.2 L8.1
NetC67_2: C67.2 L9.1 P9.2 | length 5
  Top Layer w0.381: P9.2 C67.2@80.213,21.775 ; C67.2 L9.1
NetC68_2: C68.2 R33.1 | length 1.1
  Top Layer w0.381: R33.1 C68.2
NetC69_2: C69.2 R35.1 | length 1.1
  Top Layer w0.254: R35.1 C69.2
NetJ1_2: J1.2 R1.1 U1.5 | length 15.8
  Top Layer w0.152: J1.2 24.287,59.568 24.287,61.191 24.884,61.788 28.852,61.788 29.421,61.219 U1.5@32.328,61.219 ; R1.1 v1(30.348,59.182)
  Bottom Layer w0.152: v1(30.348,59.182) v1(30.348,61.219)
  other v1: 30.348,61.219
NetJ1_3: J1.3 R2.1 U1.6 | length 15.8
  Top Layer w0.102: J1.3 29.21,60.569
  Top Layer w0.152: J1.3 25.842,60.584 32.312,60.584 32.297,60.569 29.21,60.569 R2.1
NetP1_1: P1.1 R9.2 R10.2 U2.5 | length 5.7
  Top Layer w0.381: U2.5 R9.2 R10.2 P1.1
NetP2_1: P2.1 R14.2 R15.2 U4.5 | length 5.7
  Top Layer w0.381: U4.5 P2.1
NetP3_1: P3.1 R17.2 R18.2 U5.5 | length 7.1
  Top Layer w0.254: R17.2 R18.2
  Top Layer w0.381: U5.5 P3.1
NetP4_1: P4.1 R20.2 R21.2 U7.5 | length 5.7
  Top Layer w0.381: U7.5 P4.1
NetP5_1: P5.1 R22.2 R23.2 U8.5 | length 5.7
  Top Layer w0.381: U8.5 R22.2 ; R22.2 R23.2 P5.1
NetP6_1: P6.1 R26.2 R27.2 U9.5 | length 5.7
  Top Layer w0.381: U9.5 P6.1
NetP7_1: P7.1 R28.2 R29.2 U10.5 | length 5.5
  Top Layer w0.254: P7.1@15.847,15.492 P7.1@15.85,14.986
  Top Layer w0.381: 15.847,10.481 P7.1@15.847,15.492
NetP8_1: P8.1 R32.2 R33.2 U11.5 | length 7.1
  Top Layer w0.254: R32.2 R33.2
  Top Layer w0.381: U11.5 P8.1
NetP9_1: P9.1 R34.2 R35.2 U12.5 | length 5.7
  Top Layer w0.381: U12.5 P9.1
NetR3_1: R3.1 U1.7 U1.8 | length 2.1
  Top Layer w0.152: U1.8@32.328,59.269 U1.7@32.328,59.919 ; R3.1 U1.8@32.334,59.237
NetR9_1: R9.1 R13.2 U2.4 | length 2.2
  Top Layer w0.254: R9.1 R13.2 36.221,10.751 cw(c35.96,10.751) 36.144,10.566 36.139,10.561 U2.4
NetR14_1: R14.1 R16.2 U4.4 | length 2.2
  Top Layer w0.254: R14.1 R16.2 63.805,10.766 cw(c63.631,10.766) 63.754,10.643 ccw(c63.827,10.569) 63.724,10.569 U4.4
NetR17_1: R17.1 R19.2 U5.4 | length 2.2
  Top Layer w0.254: R17.1 R19.2 73,10.827 cw(c72.739,10.827) 72.923,10.643 72.918,10.638 U5.4
NetR20_1: R20.1 R24.2 U7.4 | length 2.2
  Top Layer w0.381: R20.1 R24.2 45.415,10.715 cw(c45.241,10.715) 45.364,10.592 ccw(c45.438,10.518) 45.334,10.518 U7.4
NetR22_1: R22.1 R25.2 U8.4 | length 2.2
  Top Layer w0.381: R22.1 R25.2 54.61,10.715 cw(c54.436,10.715) 54.559,10.592 54.559,10.047 cw(c54.455,10.047) U8.4
NetR26_1: R26.1 R30.2 U9.4 | length 2.2
  Top Layer w0.254: R26.1 R30.2 91.389,10.74 cw(c91.215,10.74) 91.338,10.617 ccw(c91.412,10.544) 91.308,10.544 U9.4
NetR28_1: R28.1 R31.2 U10.4 | length 2.2
  Top Layer w0.254: R28.1 R31.2 17.829,10.635 cw(c17.75,10.635) 17.75,10.556 U10.4
NetR32_1: R32.1 R36.2 U11.4 | length 2.2
  Top Layer w0.381: R32.1 R36.2 27.026,10.74 cw(c26.852,10.74) 26.975,10.617 ccw(c27.048,10.544) 26.944,10.544 U11.4
NetR34_1: R34.1 R37.2 U12.4 | length 2.2
  Top Layer w0.254: R34.1 R37.2 82.195,10.69 cw(c82.02,10.69) 82.144,10.566 ccw(c82.217,10.493) 82.113,10.493 U12.4
OUT_TS: J4.1 U3.6 | length 29.9
  Top Layer w0.102: U3.6 64.855,49.505 cw(c64.855,48.195) 64.951,49.501 cw(c64.855,48.195) 65.781,49.121
  Top Layer w0.127: 65.781,49.121 75.705,39.197 ccw(c77.501,40.993) 77.501,38.453 J4.1
PULSE_IN_N: J6.1 U3.19 | length 61.5
  Top Layer w0.102: J6.1 34.847,84.173 cw(c34.847,82.629) 36.391,82.629 36.391,72.189 ccw(c39.21,72.189) 37.217,70.196 38.692,68.72 ccw(c40.098,70.126) 40.098,68.138 57.607,68.138 cw(c57.607,65.598) 59.403,67.394 62.357,64.44 cw(c60.561,62.643) 63.101,62.643 63.101,55.598 63.144,55.397 U3.19
PULSE_IN_P: J8.1 U3.18 | length 61.6
  Top Layer w0.102: J8.1 38.214,84.173 ccw(c38.214,82.629) 36.67,82.629 36.67,72.189 ccw(c39.21,72.189) 37.414,70.393 38.89,68.918 ccw(c40.098,70.126) 40.098,68.417 57.607,68.417 cw(c57.607,65.598) 59.6,67.592 62.555,64.637 cw(c60.561,62.643) 63.381,62.643 63.381,55.598 63.348,55.387 U3.18
TESTOUT_TS: J5.1 U3.9 | length 27.9
  Top Layer w0.102: U3.9 64.913,50.114 cw(c64.913,48.987) 65.71,49.784 ; J5.1@89.893,53.683 J5.1
  Top Layer w0.127: 65.71,49.784 66.505,48.989 ccw(c67.437,49.921) 67.437,48.603 73.84,48.603 ccw(c73.84,51.143) 75.636,49.347 79.228,52.939 cw(c81.024,51.143) 81.024,53.683 J5.1@89.893,53.683
VDD2V5: C5.2 C6.2 C30.2 L1.2 U3.4 | length 19.9
  Top Layer w0.102: v1(59.639,41.148) C30.2 ; v1(59.639,42.672) C30.2 ; U3.4 63.348,46.5 cw(c57.871,46.5) 61.747,42.631 61.54,42.424 cw(c60.3,43.664) 60.3,41.91 C30.2
  Top Layer w0.381: v2(32.725,29.606) C6.2 v2(34.238,31.85) ; v2(32.956,27.165) C5.2 ; L1.2 C5.2 ; C6.2@34.239,29.605 C5.2
VDD_5V: C2.2 C3.2 C8.2 C9.2 C23.2 C24.2 C32.2 C33.2 C34.2 C35.2 C39.2 C40.2 C46.2 C47.2 C51.2 C52.2 C58.2 C59.2 C63.2 C64.2 J12.1 U2.1 U2.3 U4.1 U4.3 U5.1 U5.3 U6.3 U7.1 U7.3 U8.1 U8.3 U9.1 U9.3 U10.1 U10.3 U11.1 U11.3 U12.1 U12.3 | length 94.6
  Top Layer w0.203: U12.1 80.213,8.255 80.493,8.534 81.839,8.534 82.113,8.26 U12.3
  Top Layer w0.254: U10.1 15.85,8.232 16.149,8.532 17.412,8.532 17.75,8.194 U10.3 ; C51.2 U10.1@15.851,7.573 ; U11.1 25.044,8.28 25.349,8.585 26.619,8.585 26.944,8.26 U11.3 ; U2.1@34.24,7.572 U2.1 34.239,8.23 34.544,8.534 35.814,8.534 36.139,8.209 U2.3 ; U7.1 43.434,8.323 43.747,8.636 45.009,8.636 45.334,8.311 U7.3 ; U8.1 52.629,8.255 52.908,8.534 54.305,8.534 54.529,8.311 U8.3 ; U4.1 61.824,8.306 62.078,8.56 63.449,8.56 63.724,8.285 U4.3 ; U5.1 71.018,8.23 71.298,8.509 72.644,8.509 72.918,8.235 U5.3 ; U9.1 89.408,8.28 89.687,8.56 91.059,8.56 91.308,8.311 U9.3
  Top Layer w0.381: U6.3 10.526,20.208 13.716,17.018 13.716,9.144 13.355,8.783 C33.2 ; C52.2 U10.1@15.847,7.571 ; C58.2 U11.1@25.043,7.572 ; C2.2 U2.1@34.24,7.572 ; C35.2 U7.1 ; C34.2 C35.2@43.435,5.292 ; C39.2 U8.1@52.628,7.572 ; C8.2 U4.1@61.825,7.572 ; C23.2 U5.1@71.017,7.572 ; C63.2 U12.1@80.212,7.572 ; U9.1 89.412,7.569 C46.2
  other v1: 8.89,2.54 11.43,2.54 13.97,2.54 22.86,2.54 32.385,2.54 41.275,2.54 50.8,2.54 60.325,2.54 69.215,2.54 78.105,2.54 87.63,2.54 8.89,3.81 11.43,3.81 13.97,3.81 22.86,3.81 32.385,3.81 41.275,3.81 50.8,3.81 60.325,3.81 69.215,3.81 78.105,3.81 87.63,3.81 8.89,5.08 11.43,5.08 13.97,5.08 22.86,5.08 32.385,5.08 41.275,5.08 50.8,5.08 60.325,5.08 69.215,5.08 78.105,5.08 87.63,5.08 8.89,6.35 11.43,6.35
VDD_DMRO: C17.2 C42.2 C43.2 L5.2 U3.11 | length 13.4
  Top Layer w0.102: U3.11 65.1,50.521 cw(c65.1,49.233) 66.01,50.144 66.598,49.556 ccw(c67.335,50.293) 67.335,49.251 C17.2
  Top Layer w0.152: C17.2 v1(67.691,50.038)
  Top Layer w0.381: v2@51.13,29.616 v2(51.142,29.605) 52.629,29.605 C42.2 ; v2@51.41,27.178 v2(51.422,27.165) C42.2 ; C43.2 v2(52.628,31.85) v2(52.628,31.85) ; L5.2 C42.2
VDD_EFUSE: C29.2 C61.2 C62.2 L8.2 R8.2 U3.2 | length 17.4
  Top Layer w0.102: C29.2@59.68,46.093 60.63,46.093 ccw(c60.63,47.485) 61.614,46.501 62.746,47.633 ccw(c62.273,48.105) 62.941,48.105 U3.2
  Top Layer w0.152: C29.2@59.68,46.093 v1(59.68,46.952) ; v1(59.69,45.242) C29.2
  Top Layer w0.203: v2@52.375,47.015 v2(52.375,47.117) 52.375,45.888 R8.2
  Top Layer w0.254: C62.2@25.044,29.605 C62.2
  Top Layer w0.381: v2(23.546,29.606) C62.2 v2(25.046,31.877) v2@25.095,31.877 ; v2@23.749,27.153 v2(23.749,27.165) C61.2 ; L8.2 C61.2 ; C62.2@25.044,29.605 C61.2
VDD_ERX: C20.2 C26.2 C27.2 L3.2 U3.20 | length 17
  Top Layer w0.102: C20.2 62.484,55.953 ccw(c63.252,55.953) 62.709,55.409 cw(c62.149,54.849) 62.941,54.849 U3.20
  Top Layer w0.152: v1(61.646,58.649) C20.2
  Top Layer w0.381: v2@69.52,29.566 v2(69.56,29.606) C27.2 v2(71.017,31.802) v2@70.993,31.826 ; v2(69.837,27.165) C26.2 ; L3.2 C26.2 ; C27.2@71.018,29.605 C26.2
VDD_I2C: C22.2 C54.2 C55.2 L7.2 R4.2 R5.2 R6.2 R7.2 U1.2 U3.30 | length 17.3
  Top Layer w0.102: C22.2 60.249,51.486 C22.2@60.223,51.511 ; C22.2@60.35,51.46 U3.30
  Top Layer w0.152: R4.2 R5.2 42.433,56.744 42.459,56.769 v1(43.586,56.769) ; v1(42.418,46.479) R7.2 ; R6.2 44.963,46.485 v1(45.974,46.485) ; C22.2@60.223,51.511 v1(60.223,52.426)
  Top Layer w0.254: U1.2@38.228,59.919 39.649,59.919 v1(40.056,59.512)
  Top Layer w0.381: v2(14.402,29.616) 15.836,29.616 C55.2 v2(15.846,31.775) ; v2(14.656,27.127) 15.809,27.127 C54.2 ; L7.2 C54.2 ; C55.2@15.847,29.605 C54.2
VDD_IO: C21.2 C49.2 C50.2 L6.2 U3.25 | length 18.7
  Top Layer w0.102: C21.2 58.471,58.315 62.196,54.59 cw(c61.378,53.772) 62.535,53.772 U3.25
  Top Layer w0.152: v1(57.531,58.649) C21.2
  Top Layer w0.381: v2@87.909,29.616 v2(87.921,29.605) 89.408,29.605 C49.2 ; v2@88.138,27.153 v2(88.151,27.165) C49.2 ; L6.2 C49.2 ; C50.2 v2(89.409,31.827) v2@89.433,31.852
VDD_TDC_ANAL: C18.2 C65.2 C66.2 L9.2 U3.22 | length 17.7
  Top Layer w0.102: C18.2 60.554,58.014 ccw(c62.393,58.014) 61.092,56.713 62.181,55.624 cw(c60.837,54.28) 62.73,54.449 62.73,54.287 ; U3.22 62.738,54.287
  Top Layer w0.152: v1(59.715,58.649) C18.2
  Top Layer w0.381: v2@78.715,29.616 v2(78.725,29.606) C66.2 v2(80.212,31.878) v2@80.188,31.902 ; v2@78.943,27.153 v2(78.956,27.165) C65.2 ; L9.2 C65.2 ; C66.2@80.213,29.605 C65.2
VDD_TDC_DIG: C11.2 C12.2 C19.2 L2.2 U3.16 | length 12.7
  Top Layer w0.102: U3.16 63.551,52.792 cw(c64.505,52.792) 63.829,53.466 ; 63.831,53.468 cw(c64.505,52.792) 64.505,53.746 C19.2 v1(64.922,54.508)
  Top Layer w0.254: C11.2 C12.2@61.824,29.605
  Top Layer w0.381: v2(60.335,29.606) C12.2 v2(61.822,31.8) ; v2(60.744,27.165) C11.2 L2.2
VDD_TS: C16.2 C37.2 C38.2 L4.2 U3.7 | length 14.1
  Top Layer w0.102: U3.7 64.084,49.708 63.957,49.581 63.957,48.997 ccw(c65.061,48.997) 64.28,48.216 64.314,48.183 cw(c63.273,47.142) 64.745,47.142 C16.2
  Top Layer w0.152: v1(64.745,45.237) C16.2
  Top Layer w0.381: v2@41.91,29.616 v2(41.92,29.606) C38.2 v2(43.435,31.853) v2@43.536,31.953 ; v2(42.177,27.165) C37.2 ; L4.2 C37.2 ; C38.2@43.434,29.605 C37.2
VEXT: J1.1 R1.2 R2.2 R3.2 | length 7
  Top Layer w0.152: J1.1 27.137,55.489 28.407,56.759 R2.2 29.22,56.769 R1.2 R3.2
VREF_TS: C31.2 U3.5 U6.4 | length 71.7
  Top Layer w0.102: C31.2 10.526,32.562 cw(c13.066,32.562) 11.27,34.358 13.556,36.645 cw(c15.352,34.849) 15.352,37.389 57.749,37.389 ccw(c57.749,39.929) 59.545,38.133 62.807,41.395 ccw(c61.011,43.191) 63.551,43.191 U3.5
  Top Layer w0.381: U6.4 C31.2
pads on no net: J1. J1.4 J1.5 U3.0@61.852,50.719 U3.0@61.942,50.719 U3.0@62.037,50.719 U3.0@62.97,49.849 U3.0@62.147,50.719 U3.0@62.257,50.719 U3.0@62.367,50.719 U3.0@62.462,50.719 U3.0@62.552,50.719 U3.0@62.642,50.719 U3.0@62.752,50.719 U3.0@62.833,50.719 U3.0@62.891,49.849 U3.0@62.946,50.719 U3.0@63.027,50.719 U3.0@63.046,49.849 U3.0@63.137,50.719 U3.0@63.234,50.719 U3.0@63.321,49.849 U3.0@63.324,50.719 U3.0@63.421,50.718 U3.0@63.498,49.849 U3.0@63.531,50.719 U3.0@63.657,49.916 U3.0@63.657,50.016 U3.0@63.657,50.092 U3.0@63.657,50.192 U3.0@63.657,50.289 U3.0@63.657,50.365 U3.0@63.657,50.446 U3.0@63.657,50.546 U6.1 U6.6

## Polygon pours and split planes (outlines as drawn)
GND on Bottom Layer "Signal-No Net" (solid, pour order 2): 0,0 101.6,0 101.6,43.18 101.6,91.44 0,91.44
no net on Bottom Layer "Signal-No Net" (solid, pour order 4): 0,0 101.6,0 101.6,91.44 0,91.44 0,0
GND on Top Layer "Signal-No Net" (solid, pour order 6): 0,0 101.6,0 101.6,91.44 0,91.44 0,0
VDD_I2C on POWER (split plane): 52.747,55.49 52.849,55.389 52.888,55.358 52.935,55.339 52.984,55.332 62.358,55.332 62.358,50.206 62.358,49.367 51.714,49.367 51.67,49.361 51.665,49.36 51.618,49.341 51.579,49.31 48.231,45.963 24.943,45.963 24.893,45.956 24.866,45.945 24.847,45.937 24.807,45.907 21.124,42.224 21.093,42.184 21.085,42.165 21.074,42.138 21.068,42.088 21.068,10.2 0.51,10.2 0.51,71.563 36.674,71.563
VDD_5V on POWER (split plane): 101.09,0.51 0.51,0.51 0.51,9.815 101.09,9.815
VDD_EFUSE on POWER (split plane): 62.358,45.786 62.358,44.337 56.871,44.337 56.827,44.332 56.821,44.331 56.775,44.312 56.735,44.281 55.267,42.813 35.458,42.813 35.409,42.807 35.362,42.788 35.323,42.757 30.344,37.779 30.314,37.739 30.306,37.72 30.294,37.693 30.288,37.643 30.288,10.2 21.452,10.2 21.452,42.008 25.022,45.579 48.311,45.579 48.361,45.585 48.388,45.596 48.407,45.604 48.447,45.635 51.794,48.982 62.358,48.982
VDD2V5 on POWER (split plane): 62.358,41.677 60.446,39.765 45.537,39.765 45.487,39.759 45.441,39.74 45.401,39.709 39.701,34.009 39.671,33.97 39.663,33.95 39.652,33.923 39.645,33.873 39.645,10.2 30.672,10.2 30.672,37.563 35.538,42.429 55.347,42.429 55.396,42.436 55.423,42.447 55.443,42.455 55.482,42.485 56.95,43.953 62.358,43.953
VDD_IO on POWER (split plane): 101.09,10.2 86.324,10.2 86.324,61.189 86.317,61.238 86.306,61.265 86.298,61.285 86.267,61.324 79.206,68.386 79.166,68.416 79.147,68.424 79.12,68.435 79.07,68.442 61.265,68.442 61.215,68.435 61.169,68.416 61.129,68.386 58.386,65.642 58.355,65.603 58.347,65.583 58.336,65.556 58.329,65.507 58.329,55.717 53.064,55.717 53.019,55.762 36.89,71.891 36.85,71.921 36.831,71.929 36.804,71.941 36.754,71.947 0.51,71.947 0.51,90.93 101.09,90.93
VDD_ERX on POWER (split plane): 79.462,59.712 79.462,36.376 76.623,33.537 76.592,33.497 76.584,33.478 76.573,33.451 76.567,33.401 76.567,10.2 67.756,10.2 67.756,30.654 75.828,38.726 75.858,38.766 75.878,38.812 75.884,38.862 75.884,53.848 75.878,53.898 75.858,53.944 75.828,53.984 72.318,57.494 72.278,57.525 72.259,57.533 72.231,57.544 72.182,57.55 64.454,57.55 64.405,57.544 64.358,57.525 64.318,57.494 62.541,55.717 60.924,55.717 60.924,60.677 63.554,63.308 75.866,63.308
VDD_TDC_ANAL on POWER (split plane): 85.939,61.109 85.939,10.2 76.951,10.2 76.951,33.321 79.79,36.161 79.821,36.201 79.84,36.247 79.847,36.297 79.847,59.792 79.84,59.841 79.829,59.868 79.821,59.888 79.79,59.927 76.082,63.636 76.042,63.666 76.023,63.674 75.996,63.686 75.946,63.692 63.475,63.692 63.425,63.686 63.379,63.666 63.339,63.636 60.596,60.893 60.565,60.853 60.557,60.834 60.546,60.807 60.539,60.757 60.539,55.717 58.714,55.717 58.714,65.427 61.344,68.058 78.991,68.058
VDD_TS on POWER (split plane): 67.423,46.834 67.423,41.304 62.836,36.717 52.273,36.717 52.223,36.711 52.177,36.692 52.137,36.661 48.861,33.384 48.83,33.345 48.822,33.325 48.811,33.298 48.804,33.249 48.804,10.2 40.03,10.2 40.03,33.794 45.617,39.381 60.526,39.381 60.575,39.388 60.603,39.399 60.622,39.407 60.662,39.437 62.686,41.462 62.716,41.502 62.736,41.548 62.742,41.598 62.742,45.786 62.742,47.636 66.621,47.636
VDD_DMRO on POWER (split plane): 71.512,50.543 71.512,40.44 64.64,33.568 60.3,33.568 60.25,33.561 60.204,33.542 60.164,33.511 58.056,31.403 58.025,31.363 58.017,31.344 58.006,31.317 57.999,31.267 57.999,10.2 49.189,10.2 49.189,33.169 52.353,36.333 62.916,36.333 62.966,36.34 62.993,36.351 63.012,36.359 63.052,36.389 67.751,41.088 67.781,41.128 67.8,41.174 67.807,41.224 67.807,46.914 67.8,46.964 67.781,47.01 67.751,47.05 66.836,47.964 66.796,47.995 66.777,48.003 66.75,48.014 66.7,48.02 62.742,48.02 62.742,50.013 65.395,50.013 65.445,50.02 65.472,50.031 65.491,50.039 65.531,50.07 66.983,51.522 70.532,51.522
VDD_TDC_DIG on POWER (split plane): 75.5,53.768 75.5,38.942 67.428,30.87 67.398,30.83 67.39,30.811 67.378,30.784 67.372,30.734 67.372,10.2 58.384,10.2 58.384,31.188 60.379,33.183 64.719,33.183 64.769,33.19 64.796,33.201 64.815,33.209 64.855,33.24 71.84,40.225 71.871,40.265 71.89,40.311 71.896,40.361 71.896,50.622 71.89,50.672 71.879,50.699 71.871,50.718 71.84,50.758 70.748,51.85 70.708,51.881 70.689,51.889 70.662,51.9 70.612,51.907 66.904,51.907 66.854,51.9 66.808,51.881 66.768,51.85 65.315,50.398 62.742,50.398 62.742,55.378 62.756,55.389 64.534,57.166 72.102,57.166
GND on GND (split plane): 101.09,0.51 0.51,0.51 0.51,90.93 101.09,90.93

## Keep-outs
Keep-Out Layer:
  the board outline again, w0.254
  text "Keep-Out Layer" at 105.283,29.134 h1.27

## Other copper
Top Layer:
  rectangle net VDD_5V: 0.406,7.061 8.128,9.906
  rectangle net VDD_5V: 7.62,1.016 13.335,9.906
  rectangle net VDD_5V: 12.954,1.016 16.51,6.096
  rectangle net VDD_5V: 22.098,1.016 25.654,6.096
  rectangle net VDD_5V: 31.283,1.044 34.839,6.124
  rectangle net VDD_5V: 40.427,1.069 43.983,6.149
  rectangle net VDD_5V: 49.825,1.069 53.381,6.149
  rectangle net VDD_5V: 58.969,1.069 62.525,6.149
  rectangle net VDD_5V: 68.113,1.069 71.669,6.149
  rectangle net VDD_5V: 77.257,1.069 80.813,6.149
  rectangle net VDD_5V: 86.401,1.069 89.957,6.149
  text "ET2 Test Board" at 8.153,87.986 h1.52
  text "2021/11/24" at 8.026,85.75 h1.52
  text "Designed By: Wei Zhang" at 8.026,83.744 h1.52
  text "Top Layer" at 105.283,65.1 h1.27
Bottom Layer:
  text "Bottom Layer" at 105.283,54.331 h1.27
GND (plane layer: these items are gaps in the copper):
  text "GND Layer" at 105.283,61.519 h1.27
POWER (plane layer: these items are gaps in the copper):
  lines w0.381: -0.102,71.755 36.754,71.755 52.883,55.626 52.984,55.524 62.62,55.524 64.454,57.358 72.182,57.358 75.692,53.848 75.692,38.862 67.564,30.734 67.564,10.008 ; 0.076,10.008 101.6,10.008 ; 21.26,10.008 21.26,42.088 24.943,45.771 48.311,45.771 51.714,49.174 62.55,49.174 62.55,55.524 ; 30.48,10.008 30.48,37.643 35.458,42.621 55.347,42.621 56.871,44.145 62.55,44.145 ; 39.837,10.008 39.837,33.873 45.537,39.573 60.526,39.573 62.55,41.598 62.55,45.786 62.55,50.206 65.395,50.206 66.904,51.714 70.612,51.714 71.704,50.622 71.704,40.361 64.719,33.376 60.3,33.376 58.191,31.267 58.191,10.008 ; 48.997,10.008 48.997,33.249 52.273,36.525 62.916,36.525 67.615,41.224 67.615,46.914 66.7,47.828 62.55,47.828 ; 58.522,55.524 58.522,65.507 61.265,68.25 79.07,68.25 86.131,61.189 86.131,10.008 ; 60.731,55.524 60.731,60.757 63.475,63.5 75.946,63.5 79.654,59.792 79.654,36.297 76.759,33.401 76.759,10.008
  text "Power Layer" at 105.283,57.912 h1.27

## Silkscreen, mask and mechanical layers (free items; w line width, h text height)
Top Overlay:
  lines w0.254: 19.558,76.454 18.542,76.454 18.034,75.946 18.034,62.484 18.796,61.722 23.114,61.722 ; 20.32,71.374 19.558,72.136 19.558,80.264 20.32,81.026 ; 24.13,54.61 23.114,55.626 23.114,68.072 24.13,69.088
  text "Pulse" at 33.96,88.697 h1.27
  text "Clk1G28" at 63.017,88.697 h1.27
  text "N" at 34.493,82.22 h1.27 r180
  text "N" at 64.948,82.22 h1.27 r180
  text "P" at 38.684,80.95 h1.27
  text "P" at 69.139,80.95 h1.27
  text "Dataout" at 94.717,80.34 h1.27 r270
  text "GND" at 20.574,79.756 h1.02
  text "P" at 88.011,78.74 h1.27 r90
  text "NA" at 20.574,78.156 h1.02
  text "NA" at 20.574,76.505 h1.02
  text "SCL" at 20.574,74.854 h1.02
  text "N" at 86.741,74.549 h1.27 r270
  text "SDA" at 20.574,73.254 h1.02
  text "Vext" at 20.574,71.628 h1.02
  text "Testout_TS" at 94.928,59.919 h1.27 r270
  text "Top Overlay" at 105.283,50.724 h1.27
  text "Ext_Clk(8M)" at 2.235,47.6 h1.27 r270
  text "Out_TS" at 94.928,41.885 h1.27 r270
  text "Vdd_I2C" at 14.402,33.604 h0.89
  text "Vdd_eFuse" at 22.581,33.604 h0.89
  text "Vdd2V5" at 33.223,33.604 h0.89
  text "Vdd_TS" at 42.367,33.604 h0.89
  text "Vdd_DMRO" at 50.698,33.604 h0.89
  text "Vdd_TDC_Dig" at 58.547,33.604 h0.89
  text "Vdd_eRx" at 69.469,33.604 h0.89
  text "Vdd_TDC_Anal" at 76.556,33.604 h0.89
  text "Vdd_IO" at 93.98,31.267 h0.89
Bottom Overlay:
  text "Bottom Overlay" at 105.283,47.117 h1.27
Top Paste:
  text "Top Paste" at 105.283,43.536 h1.27
Bottom Paste:
  text "Bottom Paste" at 105.283,39.497 h1.27
Top Solder:
  rectangle: 8.014,87.822 17.615,89.042
  text "Top Solder" at 105.283,36.322 h1.27
Bottom Solder:
  text "Bottom Solder" at 105.283,32.309 h1.27
Mechanical 1:
  text "Mechanical 1" at 105.283,25.121 h1.27
Mechanical 5:
  text "Mechanical 5" at 105.08,21.311 h1.27
Mechanical 13:
  text "Mechanical 13" at 105.283,17.932 h1.27

## Text inside footprints (layer, text, board x,y; h text height)
J2: Top Overlay "3" at 37.389,47.803 h1.27 r270; Top Overlay "4" at 39.929,47.803 h1.27 r270; Top Overlay "2" at 39.929,54.407 h1.27 r270; Top Overlay "1" at 37.389,53.899 h1.27 r270